# EAGLE board EQTest (EAGLE 9.1.2)
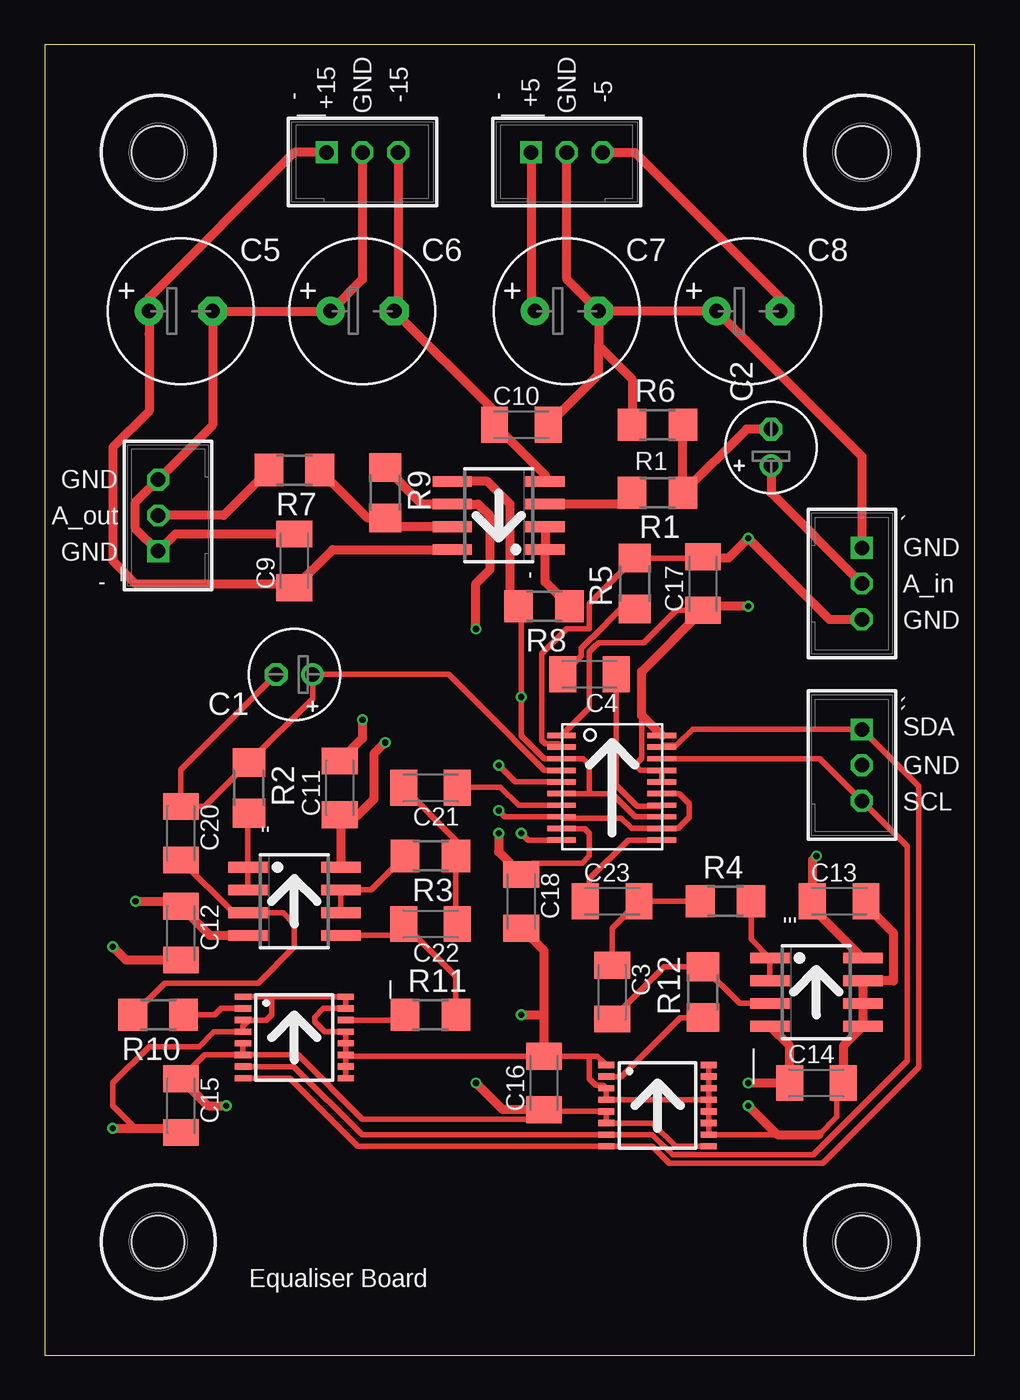
[diagram p0: board, top side]
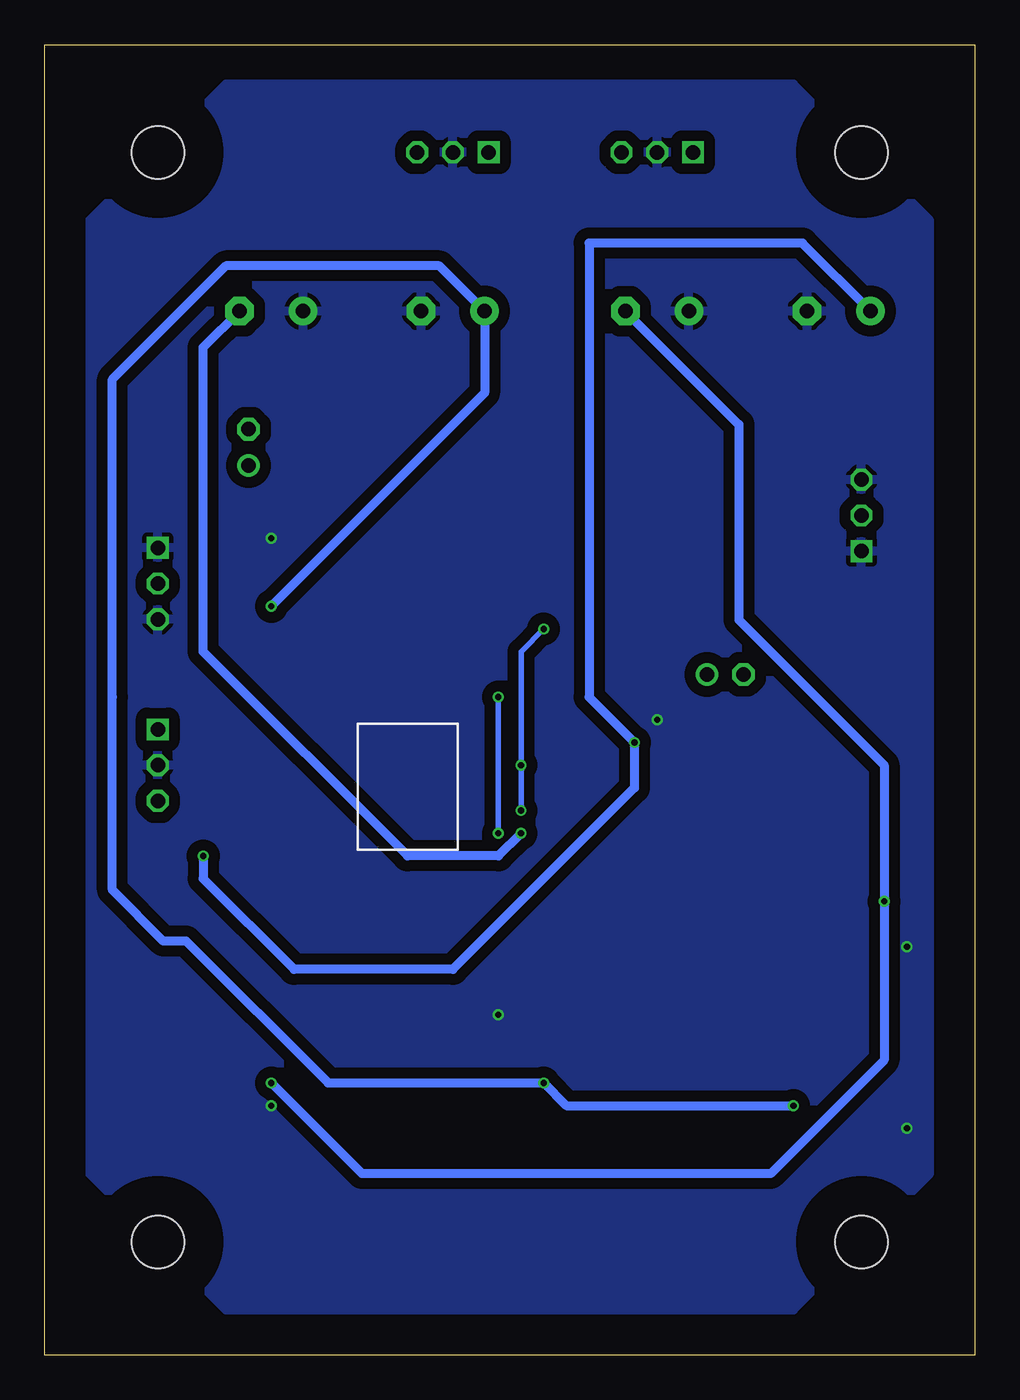
[diagram p1: board, bottom side, seen from below]

Size 52.05 x 73.33 mm. Coordinates in mm from the lower left corner, seen from the top.
Outline: 0,0 52.05,0 52.05,73.33 0,73.33 0,0
Copper layers (1*16): Top 0.035559375mm / dielectric 1.6mm / Bottom 0.035559375mm
Design rules "oshpark-2layer": minimum track width 6mil, minimum drill 10mil, track to track 6mil, track to pad 6mil, pad to pad 6mil, via to via 6mil, smd to smd 6mil, copper to edge 15mil, drill to drill 6mil, minimum pad ring 5mil, minimum via ring 5mil, stop-mask expansion 2.5mil, vias tented up to drill 0mil, thermal gap 10mil

## Footprints (pad centres in the part's own frame; a part is rotated, then mirrored left to right if it is on the bottom)
TSSOP20 = smd 0.3 x 1.6: P$K1 -2.93,-2.825; P$K2 -2.28,-2.825; P$K3 -1.63,-2.825; P$K4 -0.98,-2.825; P$K5 -0.33,-2.825; P$K6 0.32,-2.825; P$K7 0.97,-2.825; P$K8 1.62,-2.825; P$K9 2.27,-2.825; P$K10 2.92,-2.825; P$K11 2.92,2.775; P$K12 2.27,2.775; P$K13 1.62,2.775; P$K14 0.97,2.775; P$K15 0.32,2.775; P$K16 -0.33,2.775; P$K17 -0.98,2.775; P$K18 -1.63,2.775; P$K19 -2.28,2.775; P$K20 -2.93,2.775
SO08 = smd 0.6 x 2.2: 1 -1.905,-2.6; 2 -0.635,-2.6; 3 0.635,-2.6; 4 1.905,-2.6; 5 1.905,2.6; 6 0.635,2.6; 7 -0.635,2.6; 8 -1.905,2.6
B3B-PH-K = drill 0.813 square: 1 -2,0 | drill 0.813 octagon: 2 0,0; 3 2,0
TSSOP16 = smd 0.35 x 0.9: 1 -2.275,-2.875; 2 -1.625,-2.875; 3 -0.975,-2.875; 4 -0.325,-2.875; 5 0.325,-2.875; 6 0.975,-2.875; 7 1.625,-2.875; 8 2.275,-2.875; 9 2.275,2.875; 10 1.625,2.875; 11 0.975,2.875; 12 0.325,2.875; 13 -0.325,2.875; 14 -0.975,2.875; 15 -1.625,2.875; 16 -2.275,2.875
E2-5 = drill 0.813 pad 1.27: + -1.016,0 | drill 0.813 pad 1.27 octagon: - 1.016,0
C1206K = smd 1.5 x 2: 1 -1.5,0; 2 1.5,0
E3,5-8 = drill 0.813 pad 1.6: + -1.778,0 | drill 0.813 pad 1.6 octagon: - 1.778,0
116 = hole 2.946: 0,0
R1206 = smd 1.6 x 1.803: 1 -1.422,0; 2 1.422,0

## Placement (x,y rotation side)
10K  TSSOP20  [TSSOP20]  31.75,31.75 270 top
'  NE5532  [SO08]  25.4,46.99 90 top
''  NE5532  [SO08]  13.97,25.4 270 top
'''  NE5532  [SO08]  43.18,20.32 270 top
'_  B3B-PH-K  [B3B-PH-K]  6.35,46.99 90 top
'__  B3B-PH-K  [B3B-PH-K]  17.78,67.31 0 top
'___  B3B-PH-K  [B3B-PH-K]  29.21,67.31 0 top
_  AD5242  [TSSOP16]  13.97,17.78 270 top
__  AD5242  [TSSOP16]  34.29,13.97 270 top
`  B3B-PH-K  [B3B-PH-K]  45.72,43.18 270 top
``  B3B-PH-K  [B3B-PH-K]  45.72,33.02 270 top
C1  1uF  [E2-5]  13.97,38.1 180 top
C2  1uF  [E2-5]  40.64,50.8 90 top
C3  10nF  [C1206K]  31.75,20.32 270 top
C4  10nF  [C1206K]  30.48,38.1 180 top
C5  10uF  [E3,5-8]  7.62,58.42 0 top
C6  10uF  [E3,5-8]  17.78,58.42 0 top
C7  10uF  [E3,5-8]  29.21,58.42 0 top
C8  10uF  [E3,5-8]  39.37,58.42 0 top
C9  100nF  [C1206K]  13.97,44.45 90 top
C10  100nF  [C1206K]  26.67,52.07 0 top
C11  100nF  [C1206K]  16.51,31.75 90 top
C12  100nF  [C1206K]  7.62,23.62 270 top
C13  100nF  [C1206K]  44.45,25.4 0 top
C14  100nF  [C1206K]  43.18,15.24 0 top
C15  100nF  [C1206K]  7.62,13.97 270 top
C16  100nF  [C1206K]  27.94,15.24 90 top
C17  100nF  [C1206K]  36.83,43.18 90 top
C18  100nF  [C1206K]  26.67,25.4 270 top
C20  47nF  [C1206K]  7.62,29.21 270 top
C21  150nF  [C1206K]  21.59,31.75 180 top
C22  22nF  [C1206K]  21.59,24.13 180 top
C23  22nF  [C1206K]  31.75,25.4 0 top
HOLE1  MOUNT-HOLE-0.116  [116]  45.72,6.35 0 top
HOLE2  MOUNT-HOLE-0.116  [116]  45.72,67.31 0 top
HOLE3  MOUNT-HOLE-0.116  [116]  6.35,67.31 0 top
HOLE4  MOUNT-HOLE-0.116  [116]  6.35,6.35 0 top
R1  470  [R1206]  34.29,48.26 180 top
R2  470  [R1206]  11.43,31.75 270 top
R3  470  [R1206]  21.59,27.94 180 top
R4  470  [R1206]  38.1,25.4 0 top
R5  470  [R1206]  33.02,43.18 90 top
R6  100K  [R1206]  34.29,52.07 0 top
R7  100  [R1206]  13.97,49.53 180 top
R8  2.7K  [R1206]  27.94,41.91 180 top
R9  2.7K  [R1206]  19.05,48.26 270 top
R10  47K  [R1206]  6.35,19.05 180 top
R11  47K  [R1206]  21.59,19.05 0 top
R12  47K  [R1206]  36.83,20.32 90 top

## Library data of the parts
10K = kevin
' '' ''' = ne5532
'_ '__ '___ ` `` = con-jst-ph
_ __ = ad5242
C1-C18 C20-C23 = rcl; SPICEPREFIX: C
HOLE1-HOLE4 = holes; BOM: EXCLUDE
R1-R12 = rcl; SPICEPREFIX: R

## Nets
5+: 10K.P$K1 10K.P$K16 10K.P$K17 10K.P$K20 '___.1 _.5 _.6 __.5 __.6 __.9 C7.+ C15.1 C16.1 C17.1
5-: 10K.P$K9 '___.3 C8.- C18.1
15+: '''.8 ''.8 '.8 '__.1 C5.+ C9.1 C11.1 C13.1
15-: '''.4 ''.4 '.4 '__.3 C6.- C10.1 C12.1 C14.1
AD5144: 10K.P$K3 10K.P$K6 10K.P$K10 10K.P$K13 '.5 R8.2
AUDIO_IN: `.2 C2.+
AUDIO_OUT: '_.2 R7.2
BASS+: ''.3 C20.2 R10.2
BASS_10: 10K.P$K4 C1.+ C1.- C20.1 R2.1
BASS_MEG: _.2 R10.1
BASS_OUT: ''.1 ''.2 R2.2
GROUND: 10K.P$K2 '''.5 '''.6 '''.7 '_.1 '_.3 '__.2 '___.2 _.1 _.3 _.4 _.9 _.10 _.11 _.12 _.13 _.15 _.16 __.1 __.3 __.4 __.10 __.11 __.12 __.13 __.14 __.15 __.16 `.1 `.3 ``.2 C5.- C6.+ C7.- C8.+ C9.2 C10.2 C11.2 C12.2 C13.2 C14.2 C15.2 C16.2 C17.2 C18.2 R5.2 R6.1
HIGH+: '''.3 C3.2 R12.2
HIGH_10: 10K.P$K11 C23.1
HIGH_MEG: __.2 R12.1
HIGH_OUT: '''.1 '''.2 R4.2
IN+: '.3 R1.2
IN_OUT: '.1 '.2 R8.1
LOW+: ''.5 C22.2 R11.2
LOW_10: 10K.P$K7 C21.1
LOW_MEG: _.14 R11.1
LOW_OUT: ''.6 ''.7 R3.2
N$2: C4.2 R5.1
N$22: C3.1 C23.2 R4.1
N$23: C21.2 C22.1 R3.1
N$77: C2.- R1.1 R6.2
OUT-: 10K.P$K5 10K.P$K8 10K.P$K12 10K.P$K15 '.6 R9.1
OUT_OUT: '.7 R7.1 R9.2
SCL: 10K.P$K18 _.7 __.7 ``.3
SDA: 10K.P$K19 _.8 __.8 ``.1
TREBLE_10: 10K.P$K14 C4.1

## Tracks (layer width: path | path; a pad name or v marks a point on that pad's centre or on a via)
5+  (via drill 0.35)
  Top 0.305: __.9 35.29,11.7 33.99,12.99 __.6 __.5 28.04,13.64 | 28.04,13.64 C16.1 | 10K.P$K16 10K.P$K17 33.31,32.73 33.02,33.02 33.4,33.4 33.4,35.8 | 36.6,41.68 C17.1 35.33,41.68 33.53,39.88 31.01,39.88 30.86,39.73 30.84,39.73 30.48,39.37 30.48,36.23 10K.P$K1 | C15.1 8.96,16.8 _.6 | _.6 _.5 | _.6 14.18,16.8 17.78,13.21 27.56,13.21 28,13.64 28.04,13.64
  Top 0.508: '___.1 27.21,58.64 C7.+ | 10K.P$K20 33.4,35.8 33.4,38.25 C17.1 | v39.37,41.91 36.83,41.91 36.6,41.68 | C16.1 25.63,13.74 v24.13,15.24 | C15.1 9.12,13.97 v10.16,13.97
  Bottom 0.508: v39.37,41.91 27.43,53.85 C7.+ 29.97,60.96 41.91,60.96 48.26,54.61 48.26,36.83 48.26,26.03 45.4,23.18 44.13,23.18 36.2,15.24 v24.13,15.24 22.86,13.97 v10.16,13.97
5-  (via drill 0.35)
  Top 0.305: 10K.P$K9 28.94,29.46 30.23,29.46 30.48,29.21 30.48,27.94 30.07,27.53 27.3,27.53 C18.1
  Top 0.508: '___.3 33.02,67.31 41.15,59.18 C8.- | v25.4,29.21 25.4,28.17 C18.1
  Bottom 0.508: v25.4,29.21 26.67,27.94 31.75,27.94 43.18,39.37 43.18,56.39 C8.-
15+  (via drill 0.35)
  Top 0.508: '__.1 13.97,67.31 5.84,59.18 C5.+ 5.84,57.15 5.84,52.83 3.81,50.8 3.81,44.45 5.08,43.18 13.74,43.18 C9.1 16.11,45.08 '.8 | '''.8 42.95,25.05 C13.1 42.95,27.71 v43.18,27.94 | C11.1 16.57,30.19 | 16.57,30.19 ''.8 | v19.05,34.29 18.41,33.66 18.41,31.11 17.49,30.19 16.57,30.19
  Bottom 0.508: C5.+ 9.65,62.23 21.59,62.23 21.59,36.83 v19.05,34.29 19.05,31.75 29.21,21.59 38.1,21.59 43.18,26.67 v43.18,27.94
15-  (via drill 0.35)
  Top 0.508: '__.3 19.78,58.64 C6.- 25.17,52.81 C10.1 28,49.24 '.4 | '''.4 41.68,17.31 C14.1 v39.37,15.24 | ''.4 9.25,23.49 C12.1 7.34,25.4 v5.08,25.4
  Bottom 0.508: v39.37,15.24 34.29,10.16 11.43,10.16 5.08,16.51 v5.08,25.4 5.08,33.02 13.21,41.15 13.21,52.07 C6.-
AD5144  (via drill 0.35)
  Top 0.305: 30.48,31.43 31.75,31.43 33.05,30.13 10K.P$K13 | 30.48,31.43 10K.P$K6 | 10K.P$K10 27.05,28.83 v26.67,29.21 | 30.48,31.43 30.48,33.02 30.12,33.38 10K.P$K3 27.96,33.38 26.67,34.67 26.67,34.68 v26.67,36.83 26.67,41.76 R8.2
  Top 0.508: R8.2 26.04,42.39 26.04,47.62 24.77,48.89 '.5
  Bottom 0.305: v26.67,29.21 v26.67,36.83
AUDIO_IN
  Top 0.508: `.2 40.64,48.26 C2.+
AUDIO_OUT
  Top 0.508: R7.2 10.01,46.99 '_.2
BASS+
  Top 0.305: C20.2 10.57,24.77 ''.3 13.34,24.77 13.97,24.13 13.97,22.86 11.94,20.83 6.71,20.83 R10.2
BASS_10
  Top 0.305: 10K.P$K4 27.96,32.73 26.21,34.48 26.21,34.49 22.61,38.1 C1.+ 14.99,36.73 R2.1 8.97,30.71 C20.1 7.62,32.77 C1.-
BASS_MEG
  Top 0.305: R10.1 9.53,19.05 9.88,19.41 _.2
BASS_OUT
  Top 0.305: R2.2 11.37,30.27 ''.1 ''.2
GROUND  (via drill 0.35)
  Top 0.305: C17.2 36.75,44.6 R5.2 30.48,42.06 30.48,40.64 29.21,40.64 27.82,39.25 27.82,34.4 28,34.23 28.73,34.23 10K.P$K2 29.34,34.03 | __.13 __.12 __.11 __.10 43.33,12.34 44.32,13.34 44.32,14.88 C14.2 | __.13 __.14 __.15 __.16 | __.13 __.4 __.3 31.25,15.11 30.84,15.11 30.48,15.47 30.48,16.74 | __.1 30.92,16.74 30.48,16.74 | 30.48,16.74 C16.2 16.91,16.74 _.11 | _.1 12.7,20.05 | 12.7,20.05 _.16 _.15 15.59,19.41 15.11,18.92 15.11,18.67 15.68,18.1 _.13 _.12 _.11 | _.3 11.43,18.75 | 11.43,18.75 12.41,18.75 12.7,19.05 12.7,20.05 | 11.43,18.75 11.1,18.42 _.4 9.47,18.1 8.64,17.27 5.84,17.27 3.81,15.24 3.81,13.97 5.08,12.7 7.39,12.7 C15.2 | _.11 _.10 _.9
  Top 0.508: '__.2 17.78,60.2 C6.+ C5.- 9.4,52.04 6.62,49.26 | C7.- C8.+ 45.72,50.29 `.1 | C7.- 29.21,60.2 '___.2 | C7.- 30.99,56.49 | 30.99,56.49 32.87,54.61 R6.1 | 30.99,56.49 30.99,54.89 C10.2 | 6.62,49.26 '_.3 | 6.62,49.26 5.08,47.72 5.08,46.26 '_.1 7.31,45.95 C9.2 | C13.2 45.95,25.17 47.48,23.64 47.48,20.95 '''.7 '''.6 '''.5 44.68,17.31 C14.2 | C16.2 27.94,19.05 | 27.94,19.05 27.94,22.63 C18.2 | v3.81,22.86 4.55,22.12 C12.2 | v3.81,12.7 7.39,12.7 | v39.37,13.97 40.99,12.34 43.33,12.34 | v26.67,19.05 27.94,19.05 | v17.78,35.56 17.78,34.52 C11.2 | 36.75,44.6 38.25,44.6 v39.37,45.72 43.91,41.18 `.3
  pour Bottom (isolate 0.61): 41.91,71.12 49.53,63.5 49.53,10.16 41.91,2.54 10.16,2.54 2.54,10.16 2.54,63.5 10.16,71.12
HIGH+
  Top 0.305: C3.2 34.67,21.74 R12.2 38.89,19.68 '''.3
HIGH_10
  Top 0.305: C23.1 30.48,25.63 30.48,26.67 32.64,28.83 10K.P$K11
HIGH_MEG
  Top 0.305: __.2 32.26,15.59 35.56,18.9 R12.1
HIGH_OUT
  Top 0.305: R4.2 39.52,23.28 '''.1 '''.2
IN+
  Top 0.508: '.3 32.23,47.62 R1.2
IN_OUT
  Top 0.508: '.2 '.1 28,43.27 R8.1
LOW+
  Top 0.305: R11.2 23.01,21.21 C22.2 19.46,23.49 ''.5
LOW_10
  Top 0.305: C21.1 23.14,31.8 25.5,31.8 26.51,30.78 10K.P$K7
LOW_MEG
  Top 0.305: R11.1 19.87,18.75 _.14
LOW_OUT
  Top 0.305: R3.2 18.26,26.03 ''.7 ''.6
N$2
  Top 0.305: 29.21,38.33 C4.2 30.02,39.14 30.02,39.56 30.65,40.18 30.67,40.18 32.24,41.76 R5.1
N$22
  Top 0.305: C3.1 31.75,23.9 C23.2 R4.1
N$23
  Top 0.305: C21.2 23.01,28.83 R3.1 23.01,24.21 C22.1
N$77
  Top 0.508: R6.2 R1.1 39.27,51.82 C2.-
OUT-  (via drill 0.35)
  Top 0.305: 10K.P$K15 35.5,31.43 36.07,30.86 36.07,30.1 35.45,29.48 10K.P$K12 32.85,29.48 32.26,30.06 28.99,30.06 10K.P$K8 25.75,30.13 v25.4,30.48 | 10K.P$K5 26.34,32.08 v25.4,33.02
  Top 0.508: R9.1 21.11,47.62 '.6 24.26,47.62 24.89,46.99 24.89,43.94 24.13,43.18 v24.13,40.64
  Bottom 0.305: v25.4,30.48 v25.4,33.02 25.4,39.37 v24.13,40.64
OUT_OUT
  Top 0.508: '.7 19.53,46.36 R9.2 18.08,46.84 R7.1
SCL
  Top 0.305: _.7 13.94,16.16 17.75,12.34 __.7 34,12.34 35.13,11.21 42.99,11.21 48.26,16.48 48.26,28.48 ``.3 43.36,33.38 10K.P$K18
SDA
  Top 0.305: _.8 13.71,15.5 17.52,11.7 __.8 34,11.7 34.94,10.76 43.53,10.76 48.89,16.12 48.89,31.84 ``.1 38.1,35.02 | 38.1,35.02 37.56,35.02 | 10K.P$K19 34.62,34.12 35.35,34.12 36.25,35.02 38.1,35.02
TREBLE_10
  Top 0.305: C4.1 31.98,31.9 33.15,30.73 34.48,30.73 10K.P$K14

## Text on the board
tPlace: -15 | +5 | -5 | +15 | GND | GND | R1 | GND | A_out | GND | GND | A_in | GND | SDA | GND | SCL | Equaliser Board